# EAGLE board RFD900module (EAGLE 6.3)
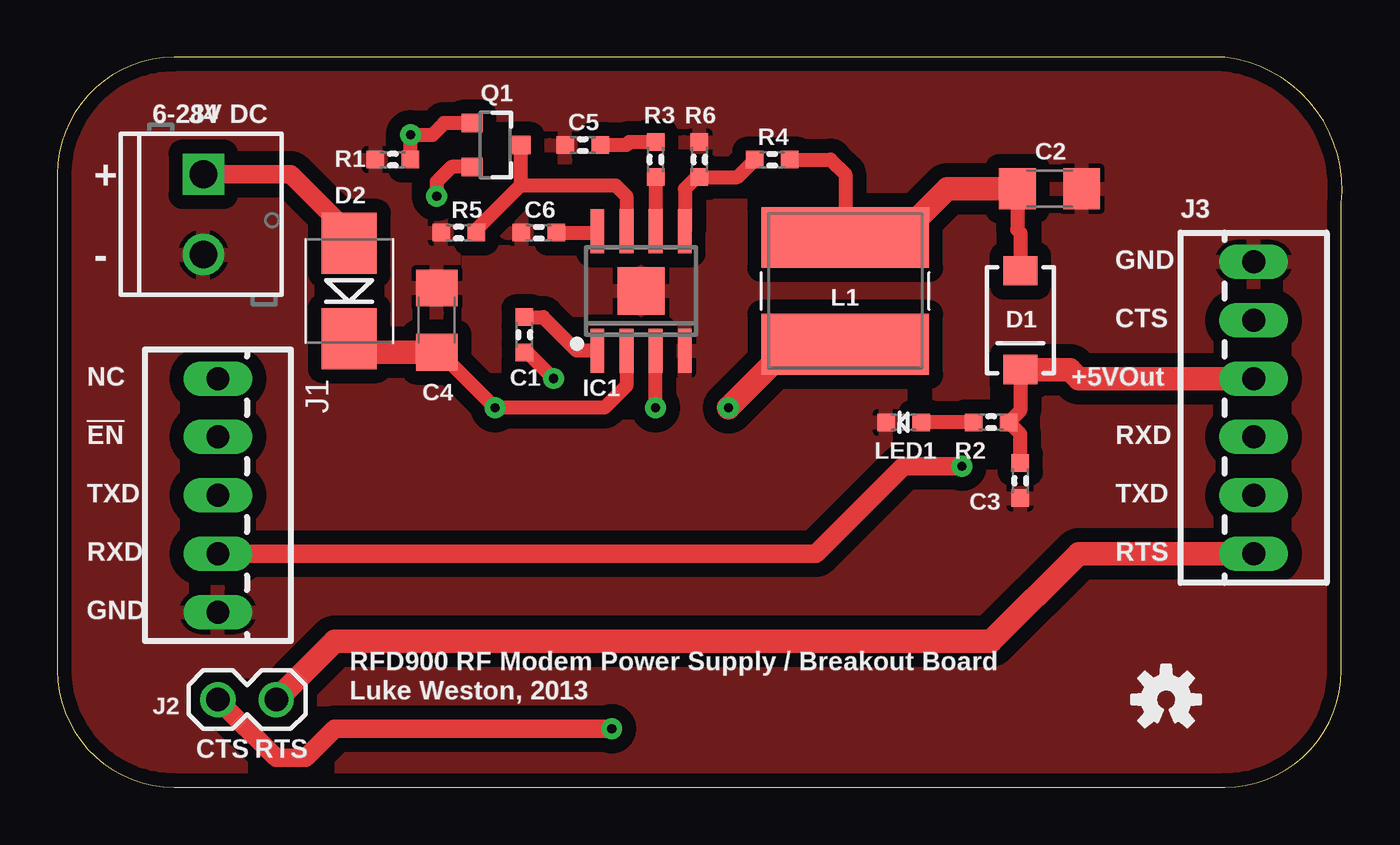
[diagram p0: board, top side]
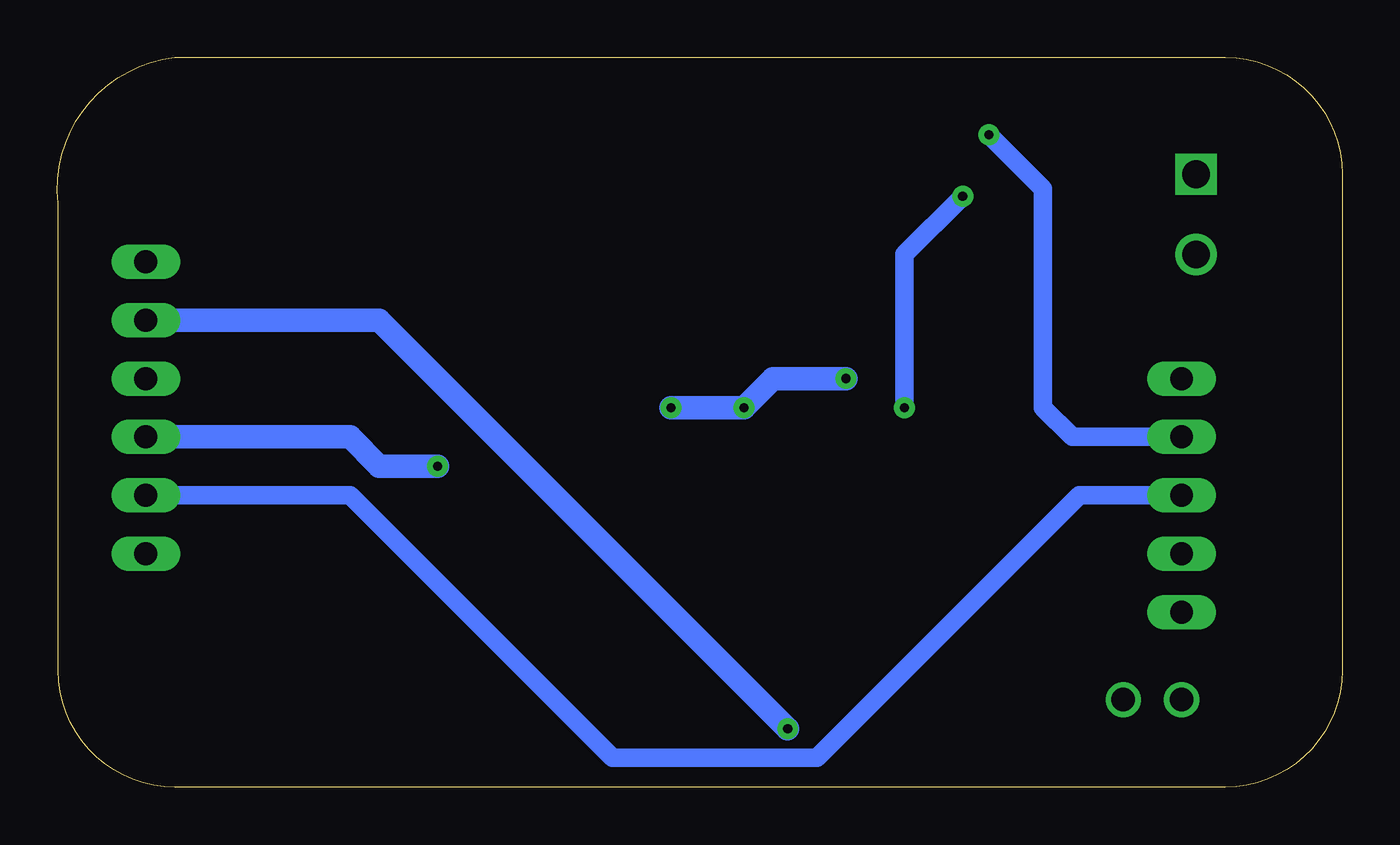
[diagram p1: board, bottom side, seen from below]

Size 55.91 x 31.75 mm. Coordinates in mm from the lower left corner, seen from the top.
Outline: 5.08,31.75 arc90 0,26.67 0,5.08 arc90 5.08,0 50.8,0 arc90 55.88,5.08 55.88,25.4 arc90 50.8,31.75 5.08,31.75
Copper layers (1*16): Top 0.035mm / dielectric 1.5mm / Bottom 0.035mm
Design rules "PCBCart-Standard *": minimum track width 8mil, minimum drill 0.4mm, track to track 8mil, track to pad 8mil, pad to pad 8mil, via to via 8mil, smd to smd 8mil, copper to edge 20mil, drill to drill 8mil, minimum pad ring 8mil, minimum via ring 10mil, stop-mask expansion 3mil, vias tented up to drill 16mil, thermal gap 8mil

## Footprints (pad centres in the part's own frame; a part is rotated, then mirrored left to right if it is on the bottom)
0603 = smd 0.762 x 0.762: 1 -0.762,0; 2 0.762,0
C1206 = smd 1.6 x 1.8: 1 -1.4,0; 2 1.4,0
SMA-DIODE = smd 1.27 x 1.47: A -2.15,0; C 2.15,0
SMA-SMB-DIODE = smd 2.65 x 2.4: A 2.075,0; C -2.075,0
SO08T = smd 1.905 x 0.6: 1 -2.6,1.905; 2 -2.6,0.635; 3 -2.6,-0.635; 4 -2.6,-1.905; 5 2.6,-1.905; 6 2.6,-0.635; 7 2.6,0.635; 8 2.6,1.905 | smd 2.057 x 2.057: 9 0,0
22-23-2051 = drill 1 long: 1 -5.08,0; 2 -2.54,0; 3 0,0; 4 2.54,0; 5 5.08,0
1X02 = drill 1.016: 1 0,0; 2 2.54,0
22-23-2061 = drill 1 long: 1 -6.35,0; 2 -3.81,0; 3 -1.27,0; 4 1.27,0; 5 3.81,0; 6 6.35,0
SCREWTERMINAL-3.5MM-2 = drill 1.2 square: 1 0,0 | drill 1.2: 2 3.5,0
CDRH = smd 7.3 x 2.65: 1 0,2.325; 2 0,-2.325
LED-0603 = smd 0.762 x 0.762: A -0.762,0; C 0.762,0
SOT23-3 = smd 0.8 x 0.9: 1 -0.95,-1; 2 0.95,-1; 3 0,1.1

## Placement (x,y rotation side)
C1  10nF  [0603]  20.32,19.68 90 top
C2  22uF  [C1206]  43.18,26.04 0 top
C3  1µF  [0603]  41.91,13.34 90 top
C4  10uF  [C1206]  16.51,20.32 90 top
C5  2.2nF  [0603]  22.86,27.94 0 top
C6  100nF  [0603]  20.95,24.13 0 top
D1  SK34A-LTP  [SMA-DIODE]  41.91,20.32 270 top
D2  SS16  [SMA-SMB-DIODE]  12.7,21.59 90 top
IC1  EUP3476  [SO08T]  25.4,21.59 90 top
J1  Interface  [22-23-2051]  6.99,12.7 270 top
J2  Flow  [1X02]  9.53,3.81 180 top
J3  Output  [22-23-2061]  52.07,16.51 90 top
J4  Power In  [SCREWTERMINAL-3.5MM-2]  6.35,26.67 270 top
L1  6.8 uH  [CDRH]  34.29,21.59 180 top
LED1  Power  [LED-0603]  36.83,15.88 180 top
Q1  DMP2035U-7  [SOT23-3]  19.05,27.94 270 top
R1  10kΩ  [0603]  14.61,27.3 180 top
R2  1kΩ  [0603]  40.64,15.88 180 top
R3  15kΩ  [0603]  26.04,27.3 90 top
R4  53.6kΩ 1%  [0603]  31.11,27.3 0 top
R5  10kΩ  [0603]  17.46,24.13 180 top
R6  10kΩ 1%  [0603]  27.94,27.3 90 top
SY  OSHW-LOGOS  [OSHW-LOGO-S]  48.26,3.81 0 top

## Library data of the parts
C1 C3 C5 C6 R1-R6 = freetronics-master-v1; PACKAGE: 0603
C2 = freetronics-jon; PACKAGE: 1206; VOLTAGE: 10V
C4 = freetronics-jon; PACKAGE: 1206; VOLTAGE: 35V
D1 = freetronics-master-v1; PACKAGE: SMA
D2 = freetronics-jon; PACKAGE: SMA
IC1 = freetronics-luke; PACKAGE: 8-SOIC
J1 = con-molex; MF: MOLEX; MPN: 22-23-2051; OC_FARNELL: 1462952; OC_NEWARK: 38C9178
J2 J4 = freetronics-master-v1
J3 = con-molex; MF: MOLEX; MPN: 22-23-2061; OC_FARNELL: 1462922; OC_NEWARK: 27C1933
L1 = freetronics-luke; SKU: CDRH6D38
LED1 = freetronics-master-v1; COLOUR: Blue; PACKAGE: 0603
Q1 = freetronics-luke; PACKAGE: SOT-23
SY = SparkFun

## Nets
!ENABLE: J1.2 Q1.1 R1.1
+5V: C3.2 D1.C J3.4 R2.1
CTS: J2.2 J3.5
GND: C2.2 C3.1 C4.2 C5.1 C6.1 IC1.4 IC1.9 J1.5 J3.6 J4.2 LED1.C R1.2 R5.2 R6.2
N$1: D2.A J4.1
N$2: IC1.7 Q1.3 R5.1
N$3: LED1.A R2.2
N$5: C2.1 D1.A L1.2 R4.2
N$18: C1.1 IC1.3 L1.1
N$19: C1.2 IC1.1
N$20: C5.2 R3.2
N$21: IC1.6 R3.1
N$22: C6.2 IC1.8
N$23: IC1.5 R4.1 R6.1
RTS: J2.1 J3.1
RXD: J1.4 J3.3
TXD: J1.3 J3.2
VIN: C4.1 D2.C IC1.2 Q1.2

## Tracks (layer width: path | path; a pad name or v marks a point on that pad's centre or on a via)
!ENABLE  (via drill 0.4)
  Top 0.61: Q1.1 16.82,28.89 16.32,28.38 v15.37,28.38 R1.1
  Bottom 0.813: v15.37,28.38 13.02,26.04 13.02,16.51 11.75,15.24 J1.2
+5V
  Top 0.61: D1.C 41.91,16.38 R2.1 41.91,15.37 C3.2
  Top 1.016: D1.C 44.06,18.17 44.45,17.78 J3.4
CTS  (via drill 0.4)
  Top 0.813: J2.2 9.53,1.27 10.79,1.27 12.06,2.54 v24.13,2.54
  Bottom 1.016: v24.13,2.54 41.91,20.32 J3.5
GND
  pour Top (isolate 0.61): -1.27,33.02 57.15,33.02 57.15,-1.27 -1.27,-1.27
N$1
  Top 0.813: J4.1 10.16,26.67 12.7,24.13 D2.A
N$2
  Top 0.406: R5.1 18.22,24.26
  Top 0.61: 18.22,24.26 20.15,26.18 | Q1.3 20.15,26.18 | 20.15,26.18 24.3,26.18 24.77,25.72 IC1.7
N$3
  Top 0.61: R2.2 LED1.A
N$5
  Top 0.61: C2.1 41.78,24.26 41.91,24.13 D1.A | 36.62,23.91 L1.2 34.29,26.67 33.66,27.3 R4.2
  Top 1.016: 36.62,23.91 38.73,26.04 C2.1
N$18  (via drill 0.4)
  Top 0.61: v26.04,16.51 IC1.3 | L1.1 31.96,19.27 | C1.1 20.45,18.92 v21.59,17.78
  Top 1.016: 31.96,19.27 v29.21,16.51
  Bottom 1.016: v21.59,17.78 24.77,17.78 v26.04,16.51 v29.21,16.51
N$19
  Top 0.61: C1.2 21.14,20.45 22.6,18.99 IC1.1
N$20
  Top 0.61: R3.2 24.89,28.07 24.77,27.94 C5.2
N$21
  Top 0.61: R3.1 IC1.6
N$22
  Top 0.61: C6.2 23.43,24.13 IC1.8
N$23
  Top 0.61: IC1.5 27.3,26.04 27.81,26.54 R6.1 29.59,26.54 R4.1
RTS
  Top 1.016: J2.1 12.06,6.35 40.64,6.35 44.45,10.16 J3.1
RXD  (via drill 0.4)
  Top 0.813: J1.4 33.02,10.16 36.83,13.97 v39.37,13.97
  Bottom 1.016: v39.37,13.97 41.91,13.97 43.18,15.24 J3.3
TXD
  Bottom 0.813: J1.3 11.43,12.7 22.86,1.27 31.75,1.27 43.18,12.7 J3.2
VIN  (via drill 0.4)
  Top 0.61: IC1.2 24.77,17.46 23.81,16.51 v19.05,16.51 16.64,18.92 C4.1 | Q1.2 17.15,26.99 16.51,26.35 v16.51,25.72
  Top 1.016: C4.1 13.46,18.92 12.87,19.52 D2.C
  Bottom 0.813: v19.05,16.51 19.05,23.18 v16.51,25.72

## Text on the board
tPlace: 6-28V DC | + | - | GND | CTS | NC | +5VOut | !EN | RXD | TXD | TXD | RXD | RTS | GND | RFD900 RF Modem Power Supply / Breakout Board | Luke Weston, 2013 | CTS | RTS